# Altium PCB AphelionFlightController.PcbDoc
Units mm, origin at the board's own origin, x right, y up, seen from the top; angles counter-clockwise.
Board outline 100 x 100 mm, 2 copper layers (Top Layer, Bottom Layer); 68 components, 49 nets, 276 pads, 64 vias.
Unrouted connection lines stored in the file: 1.
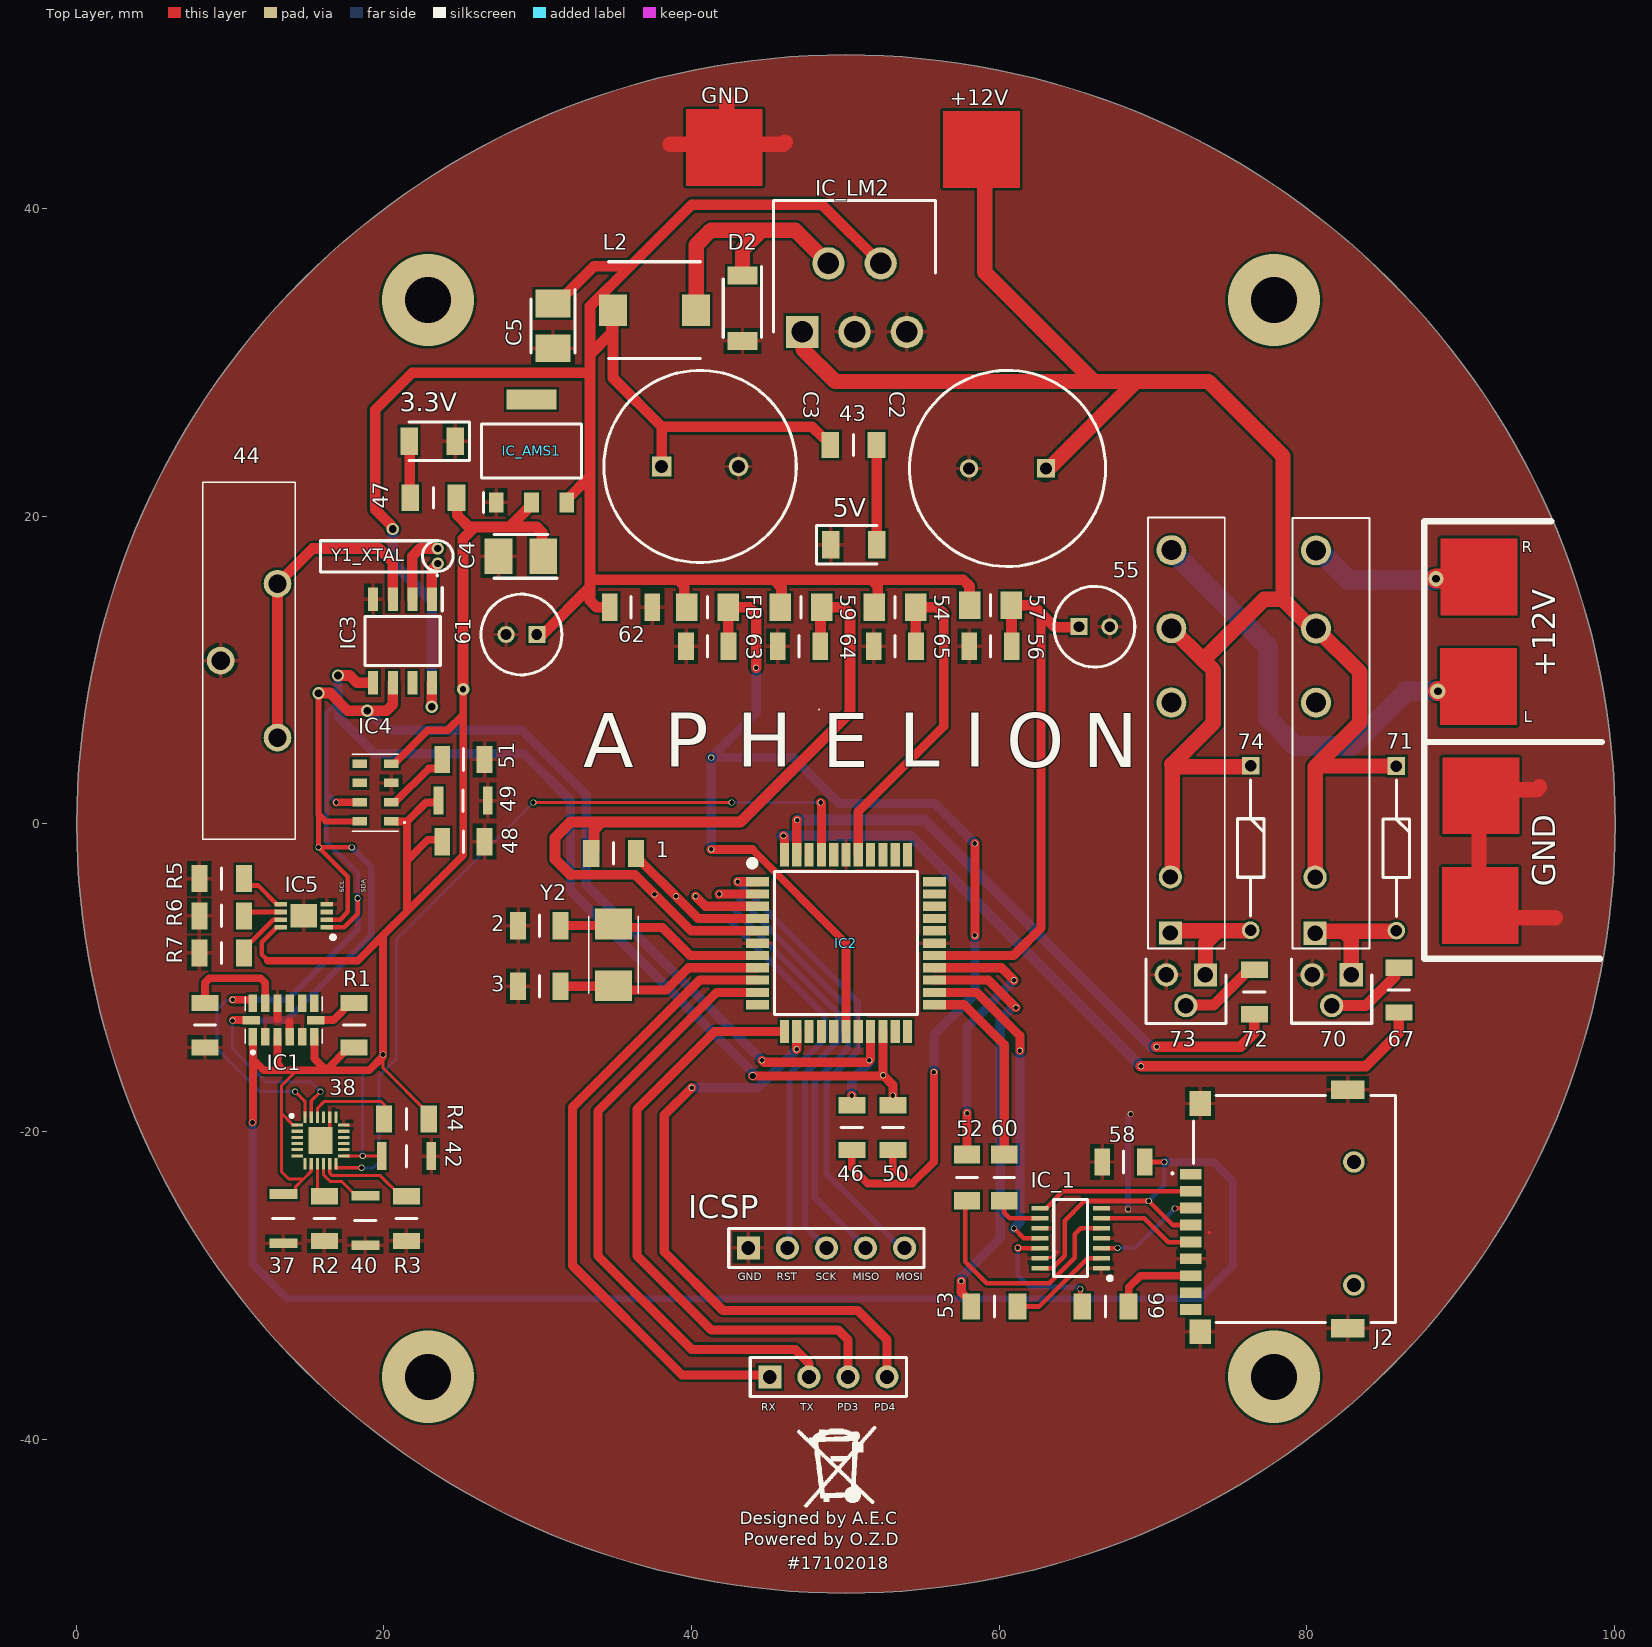
[diagram p0: Top Layer view]
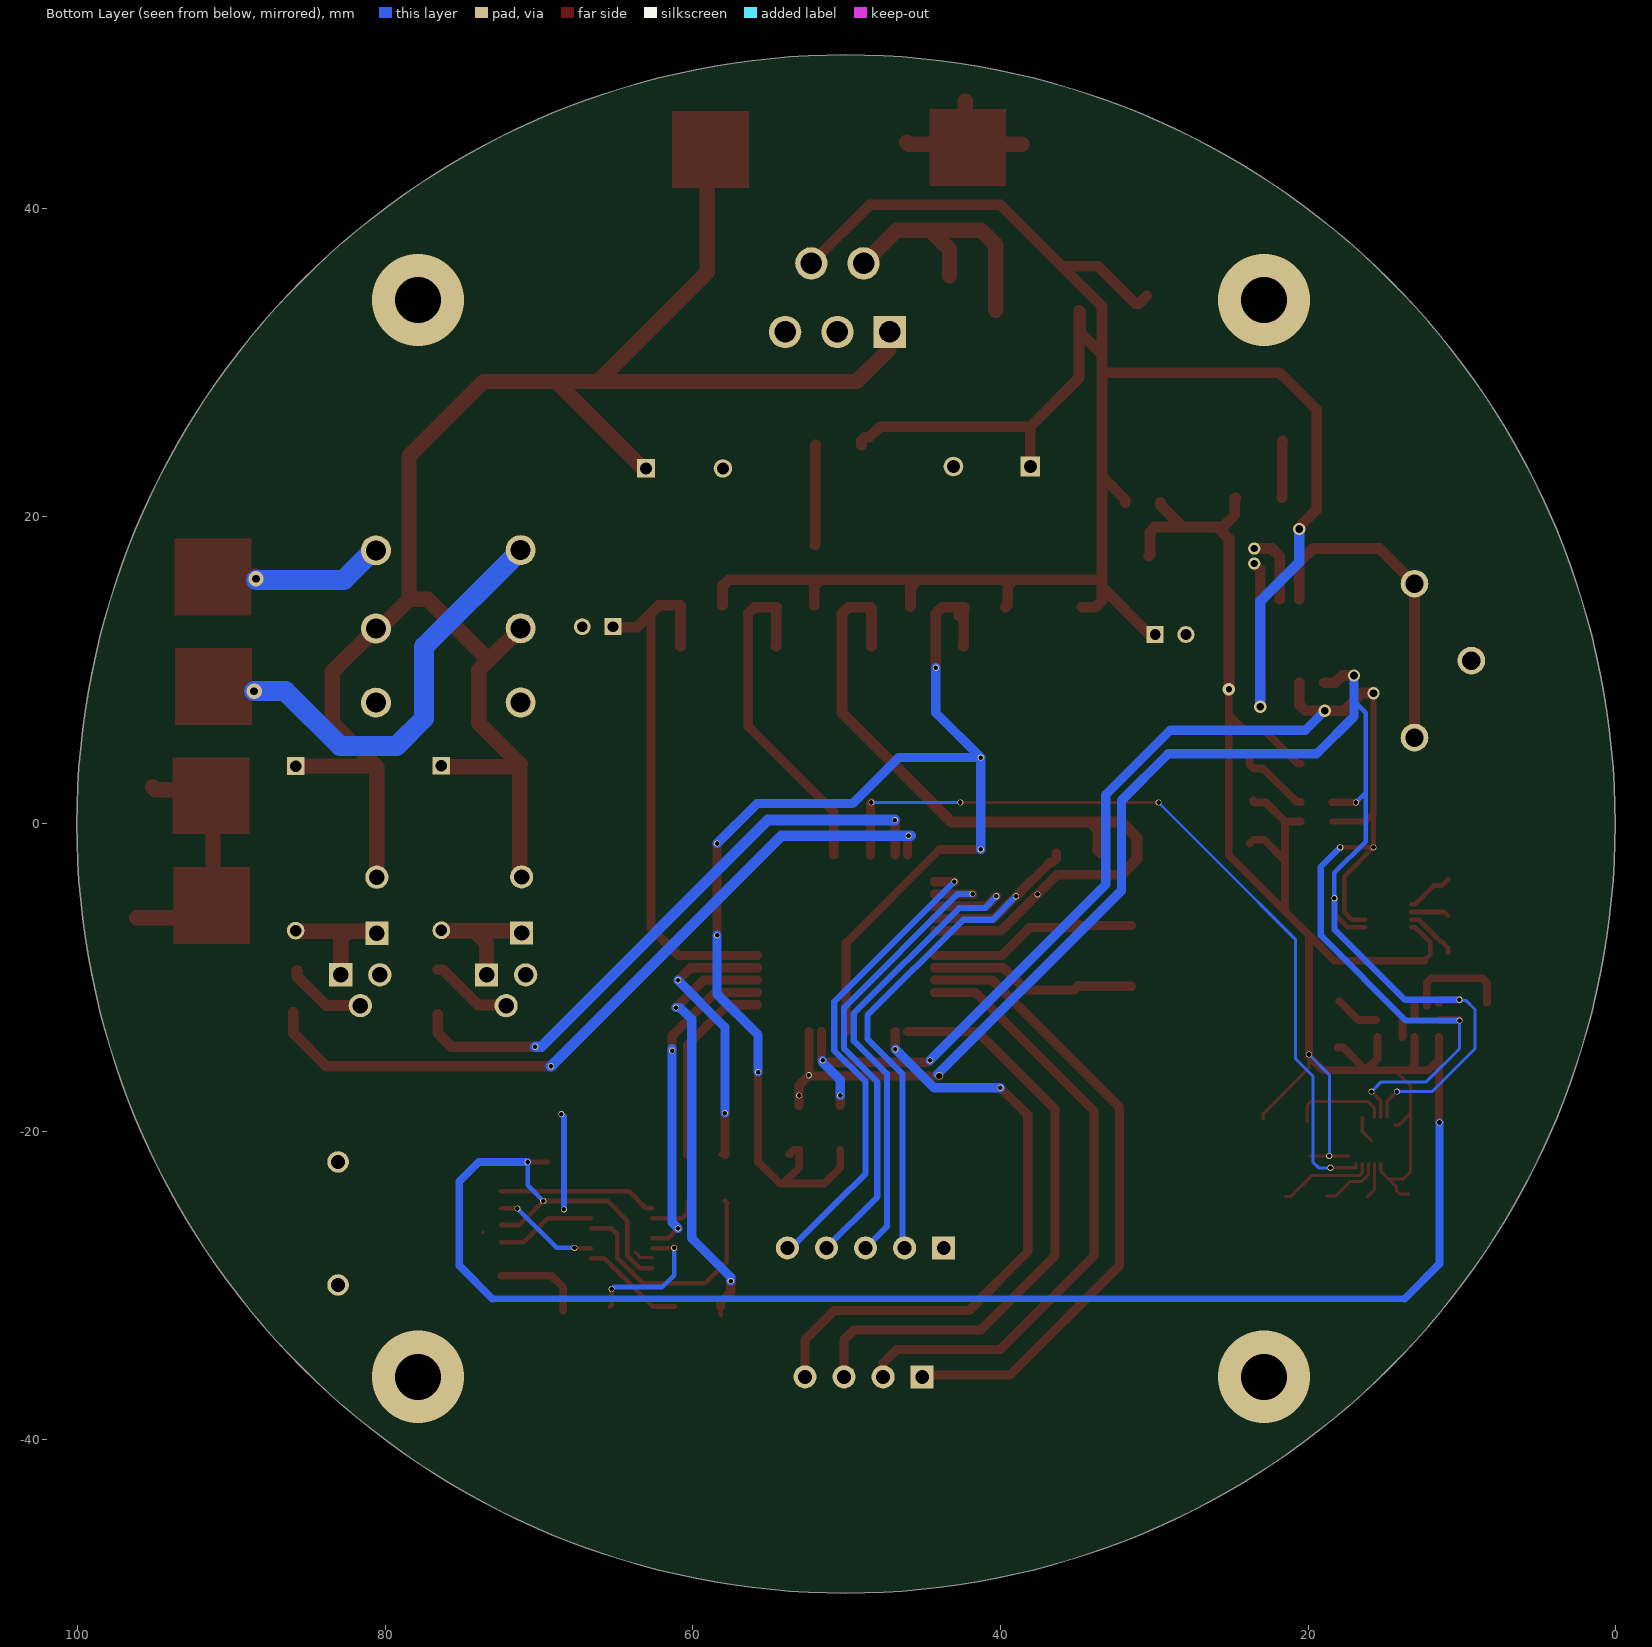
[diagram p1: Bottom Layer view, seen from below]
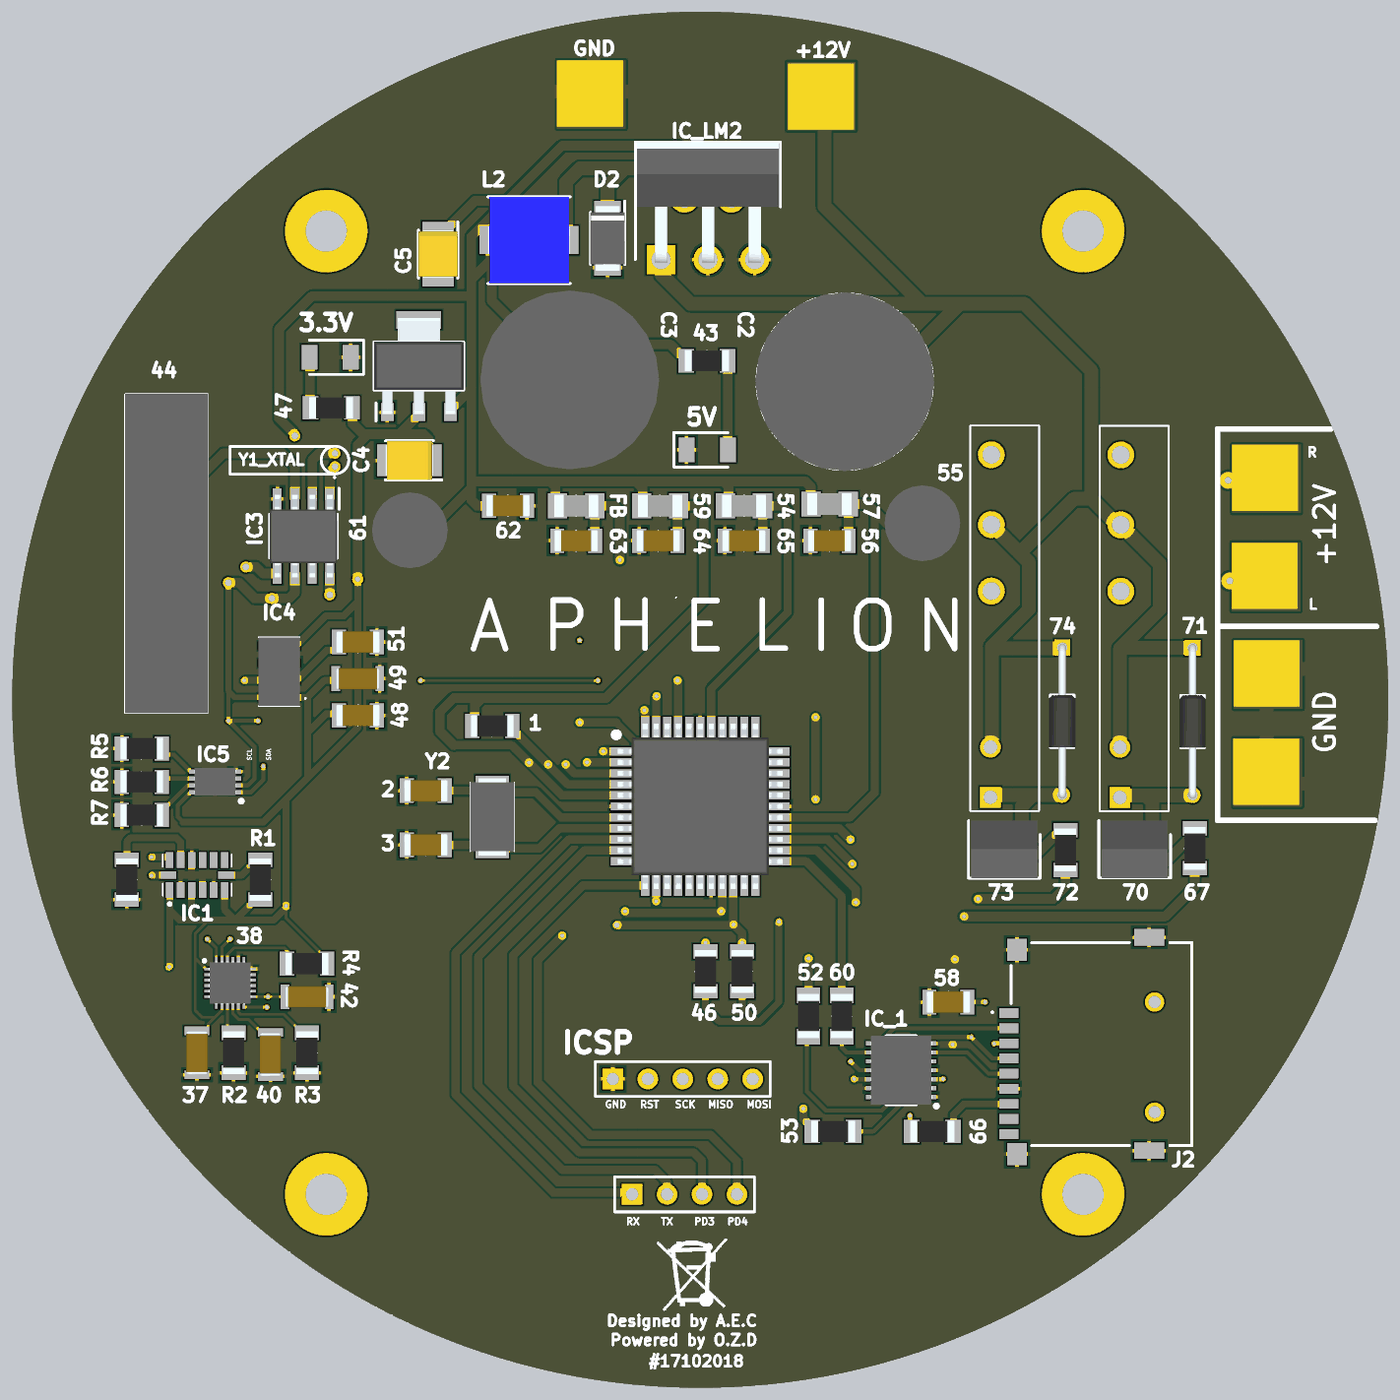
[diagram p2: 3D render of the assembled board from above, using the file's embedded part models]

## Layer stack, top to bottom
Top Solder: solder mask 0.0102, Solder Resist, Dk 3.5
Top Layer: signal copper 0.0356
Dielectric 1: dielectric 0.32, FR-4, Dk 4.8
Bottom Layer: signal copper 0.0356
Bottom Solder: solder mask 0.0102, Solder Resist, Dk 3.5

## Board outline
0.038,0 ccw(c50.038,0) 50.038,-50 ccw(c50.038,0) 100.038,0 ccw(c50.038,0) 50.038,50 ccw(c50.038,0)

## Design rules (kind name [scope] priority, off if disabled: settings)
Clearance [All] p1: gap=0.15 ignorepadtopadclearanceinfootprint=FALSE
Height [All] p1: minheight=0 maxheight=255.4 prefheight=12.7
PolygonConnect [All] p1: connectstyle=Relief reliefconductorwidth=0.254 reliefentries=4 polygonreliefangle="90 Angle" airgapwidth=0.254
RoutingVias [All] p1: holewidth=0.711 width=1.27 viastyle="Through Hole" minholewidth=0.711 minwidth=1.27 maxholewidth=0.711 maxwidth=1.27
SolderMaskExpansion [All] p1: expansion=0.102 istentingtop=FALSE
Width [All] p1: maxlimit=55 minlimit=0.1 preferedwidth=0.254 minimp=50.000000 maximp=50.000000 favimp=50.000000
29 further rules are at their usual default settings.

## Components (designator, comment, footprint, x,y, rotation, side; value= is the part's Value field where it differs from the comment)
1 "" RESC3116X65N 34.925,-1.905 r0 top
2 "C17_22pF" CAPC3216X100N 30.099,-6.604 r180 top
3 "C18_22pF" CAPC3216X100N 30.099,-10.541 r180 top
3.3V "LED1_1206" LEDC3216X130N 23.138,24.892 r180 top (schematic designator 45)
5V "LED2_1206" LEDC3216X130N 50.546,18.161 r0 top (schematic designator 41)
37 "C4_10N" CAPC3216X180N 13.462,-25.654 r270 top
38 "IC2_MPU-9250" QFN40P300X300X105-25N-D 15.875,-20.574 r0 top
40 "C5_100N" CAPC3216X180N 18.796,-25.781 r270 top
42 "C6_100N" CAPC3216X180N 21.463,-21.59 r180 top
43 "220ohm" RESC3216X70N 50.522,24.638 r0 top
44 "U1_KLS5" KLS5CR203204 13.081,15.621 r270 top
46 "" RESC3116X65N 50.419,-19.738 r90 top
47 "120ohm" RESC3216X70N 23.217,21.209 r0 top
48 "C1_100N" CAPC3216X100N 25.163,-1.143 r180 top
49 "C2_10uF" CAPC3216X180N 25.146,1.524 r180 top
50 "" RESC3116X65N 53.086,-19.738 r90 top
51 "C3_100N" CAPC3216X100N 25.163,4.191 r0 top
52 "" RESC3216X70N 57.912,-22.987 r270 top
53 "" RESC3216X70N 59.69,-31.369 r0 top
54 "" BEADC3216X180N 53.213,14.097 r0 top
55 "10uF" CAPPRD200W50D525H1250 65.183,12.827 r0 top
56 "C16_100N" CAPC3216X100N 59.436,11.557 r180 top
57 "" BEADC3216X180N 59.436,14.224 r0 top
58 "C11_100N" CAPC3216X100N 68.072,-21.971 r180 top
59 "" BEADC3216X180N 47.117,14.097 r0 top
60 "" RESC3216X70N 60.325,-22.987 r270 top
61 "10uF" CAPPRD200W50D525H1250 29.94,12.319 r180 top
62 "C12_100N" CAPC3216X100N 36.068,14.097 r0 top
63 "C13_100N" CAPC3216X100N 41.021,11.557 r180 top
64 "C14_100N" CAPC3216X100N 46.99,11.557 r180 top
65 "C15_100N" CAPC3216X100N 53.213,11.557 r180 top
66 "" RESC3216X70N 66.905,-31.369 r180 top
67 "" RESC3116X65N 85.979,-10.795 r270 top
70 "BC547B" TO127P419X482X1041-3P 82.88,-9.806 r180 top
71 "1N4148" DIOAD1068W53L380D172 85.816,3.767 r270 top
72 "" RESC3116X65N 76.581,-10.922 r270 top
73 "BC547B" TO127P419X482X1041-3P 73.406,-9.811 r180 top
74 "1N4148" DIOAD1068W53L380D172 76.342,3.79 r270 top
C2 "" CAPPRD500W60D1275H2200 63.039,23.114 r180 top
C3 "" CAPPRD500W65D1250H2200 38.053,23.241 r0 top
C4 "C10_TANT10" CAPPM3528X210N 28.903,17.399 r180 top
C5 "C9_TANT10" CAPPM3528X210N 30.988,32.385 r270 top
D2 "" SODFL4725X110N 43.307,33.528 r270 top
FB "" BEADC3216X180N 41.021,14.097 r0 top (schematic designator F_BEAD1)
IC1 "" CC-14-1 13.481,-12.745 r90 top
IC2 "ATMEGA32-16AU" QFP80P1200X1200X120-44N 50.038,-7.747 r0 top
IC3 "" SOIC127P600X175-8N 21.209,11.893 r270 top (schematic designator "IC3 DS1307")
IC4 "" MPL3115A2R1 19.44,2.042 r180 top (schematic designator "IC4 MPL3115A2")
IC5 "" SON50P300X200X100-9N-D 14.785,-5.969 r180 top (schematic designator "IC5 MCP9808")
IC_1 "" SON65P440X500X110-14N 64.643,-26.924 r180 top
IC_AMS1 "" SOT229P700X180-4N 29.591,24.257 r90 top
IC_LM2 "" TO170P470X1028X2142-5P 47.195,31.989 r0 top
J2 "L-KLS1-TF-003-H1.85-R" L-KLS1-TF-003-H1.85-R 83.058,-25.019 r90 top
L2 "33uH" INDPM6063X300N 37.592,33.401 r0 top
R1 "" RESC3116X65N 18.065,-13.077 r270 top
R2 "" RESC3116X65N 16.129,-25.654 r90 top
R3 "" RESC3116X65N 21.463,-25.654 r90 top
R4 "" RESC3116X65N 21.463,-19.177 r180 top
R5 "" RESC3116X65N 9.451,-3.556 r0 top
R6 "" RESC3116X65N 9.451,-5.969 r0 top
R7 "" RESC3116X65N 9.451,-8.382 r0 top
Y1_XTAL "" NC26LF-327 23.495,17.422 r90 top (schematic designator Y1)
Y2 "16MHZ" NX5032GA16MHZSTDCSK4 34.925,-8.509 r90 top
? "Comment" HDR1X4 45.085,-35.941 r0 top
? "Comment" HDR1X5 43.688,-27.559 r0 top
? "Comment" TE_1393236-2 82.821,-3.414 r90 top
? "Comment" TE_1393236-2 73.411,-3.401 r90 top
? "" RESC3116X65N 8.367,-13.077 r270 top

## Footprints (in the part's own frame and the unit in brackets; to place one, negate y for a bottom-side part, rotate by r counter-clockwise, add the part's x,y. Pads: shape width x height; smd on the part's side, far side on the other; paste and mask are expansions set on the pad)
BEADC3216X180N [mm]
  rect 1.4x1.8 smd: 1(-1.35,0) 2(1.35,0)
  silkscreen extent 0,-0.7 0,0.7, body extent -1.6,-0.8 1.6,0.8, height 1.8
CAPC3216X100N [mm]
  rect 1.02x1.78 smd: 1(-1.38,0) 2(1.38,0)
  silkscreen extent 0,-0.7 0,0.7, body extent -1.6,-0.8 1.6,0.8, height 1
CAPC3216X180N [mm]
  rect 0.62x1.82 smd: 1(-1.6,0) 2(1.6,0)
  silkscreen extent 0,-0.7 0,0.7, body extent -1.6,-0.8 1.6,0.8, height 1.8
CAPPM3528X210N [mm]
  rect 1.8x2.3 smd: 1(-1.45,0) 2(1.45,0)
  silkscreen extent -2.35,-1.43 1.75,1.43, body extent -1.75,-1.43 1.75,1.43, height 2.1
CAPPRD200W50D525H1250 [mm]
  rect 1.1x1.1 hole 0.7: 1(0,0)
  round 1.1 hole 0.7: 2(2,0)
  silkscreen extent -1.62,-2.62 3.63,2.62, body extent -1.75,-2.75 3.75,2.75, height 12.5
CAPPRD500W60D1275H2200 [mm]
  rect 1.2x1.2 hole 0.8: 1(0,0)
  round 1.2 hole 0.8: 2(5,0)
  silkscreen extent -3.88,-6.37 8.87,6.37, body extent -4,-6.5 9,6.5, height 22
CAPPRD500W65D1250H2200 [mm]
  rect 1.275x1.275 hole 0.85: 1(0,0)
  round 1.275 hole 0.85: 2(5,0)
  silkscreen extent -3.75,-6.25 8.75,6.25, body extent -4,-6.5 9,6.5, height 22
CC-14-1 [mm]
  rect 1.145x0.55 smd: 1(-1.098,2) 2(-1.098,1.2) 3(-1.098,0.4) 4(-1.098,-0.4) 5(-1.098,-1.2) 6(-1.098,-2) 8(1.098,-2) 9(1.098,-1.2) 10(1.098,-0.4) 11(1.098,0.4) 12(1.098,1.2) 13(1.098,2)
  rect 0.55x1.145 smd: 7(0,-2.097) 14(0,2.097)
  silkscreen extent -2.2,-2.5 1.5,2.5
DIOAD1068W53L380D172 [mm]
  rect 1.15x1.15 hole 0.75: 1(0,0)
  round 1.15 hole 0.75: 2(10.7,0)
  silkscreen extent 0.92,-0.86 9.77,0.86, body extent -0.26,-0.95 10.95,0.95, height 1.9
HDR1X4 [mm] "Connector; Header; 4 Position"
  rect 1.5x1.5 hole 0.9: 1(0,0)
  round 1.5 hole 0.9: 2(2.54,0) 3(5.08,0) 4(7.62,0)
  silkscreen extent -1.27,-1.27 8.89,1.27
HDR1X5 [mm] "Connector; Header; 5 Position"
  rect 1.5x1.5 hole 0.9: 1(0,0)
  round 1.5 hole 0.9: 2(2.54,0) 3(5.08,0) 4(7.62,0) 5(10.16,0)
  silkscreen extent -1.27,-1.27 11.43,1.27
INDPM6063X300N [mm]
  rect 1.8x2.05 smd: 1(-2.7,0) 2(2.7,0)
  silkscreen extent -3,-3.15 3,3.15, body extent -3,-3.15 3,3.15, height 3
KLS5CR203204 [mm]
  round 1.8 hole 1.2: 1(0,0) 2(10,0) 3(5,-3.7)
  silkscreen extent -6.6,-4.85 16.6,1.15, body extent -6.6,-4.85 16.6,1.15, height 18.13
L-KLS1-TF-003-H1.85-R [mm]
  rect 0.7x1.4 smd: 1(2.25,10.6) 2(1.15,10.6) 3(0.05,10.6) 4(-1.05,10.6) 5(-2.15,10.6) 6(-3.25,10.6) 7(-4.35,10.6) 8(-5.45,10.6) 9(-6.55,10.6)
  rect 1.6x1.4 smd: 10(-8,10) 13(6.85,10)
  rect 1.2x2.2 smd: 11(-7.75,0.4) 12(7.75,0.4)
  round 1.4 hole 0.9: 14(3.05,0) 15(-4.95,0)
  silkscreen extent -7.37,-2.71 7.37,11.84
LEDC3216X130N [mm]
  rect 1.15x1.8 smd: 1(-1.5,0) 2(1.5,0)
  silkscreen extent -2.42,-1.25 1.5,1.25
MPL3115A2R1 [mm]
  rect 0.95x0.55 smd: 1(-1.025,1.875) 2(-1.025,0.625) 3(-1.025,-0.625) 4(-1.025,-1.875) 5(1.025,-1.875) 6(1.025,-0.625) 7(1.025,0.625) 8(1.025,1.875)
  silkscreen extent -1.95,-2.5 1.5,2.5, body extent -1.5,-2.5 1.5,2.5, height 1.3
NC26LF-327 [mm]
  round 0.8 hole 0.47: 1(-0.485,0) 2(0.485,0)
  silkscreen extent -1.29,-1 1,1
NX5032GA16MHZSTDCSK4 [mm]
  rect 2x2.4 smd: 1(-2,0) 2(2,0)
  silkscreen extent -2.5,-1.6 2.5,1.6, body extent -2.8,-1.6 2.8,1.6, height 1.6
QFN40P300X300X105-25N-D [mm]
  rect 0.75x0.2 smd: 1(-1.5,1) 2(-1.5,0.6) 3(-1.5,0.2) 4(-1.5,-0.2) 5(-1.5,-0.6) 6(-1.5,-1) 13(1.5,-1) 14(1.5,-0.6) 15(1.5,-0.2) 16(1.5,0.2) 17(1.5,0.6) 18(1.5,1)
  rect 0.2x0.75 smd: 7(-1,-1.5) 8(-0.6,-1.5) 9(-0.2,-1.5) 10(0.2,-1.5) 11(0.6,-1.5) 12(1,-1.5) 19(1,1.5) 20(0.6,1.5) 21(0.2,1.5) 22(-0.2,1.5) 23(-0.6,1.5) 24(-1,1.5)
  rect 1.59x1.75 smd: 25(0,0)
  silkscreen extent -1.97,1.5 -1.78,1.7, body extent -1.55,-1.55 1.55,1.55, height 1.05
QFP80P1200X1200X120-44N [mm]
  rect 1.5x0.6 smd: 1(-5.75,4) 2(-5.75,3.2) 3(-5.75,2.4) 4(-5.75,1.6) 5(-5.75,0.8) 6(-5.75,0) 7(-5.75,-0.8) 8(-5.75,-1.6) 9(-5.75,-2.4) 10(-5.75,-3.2) 11(-5.75,-4) 23(5.75,-4) 24(5.75,-3.2) 25(5.75,-2.4) 26(5.75,-1.6) 27(5.75,-0.8) 28(5.75,0) 29(5.75,0.8) 30(5.75,1.6) 31(5.75,2.4) 32(5.75,3.2) 33(5.75,4)
  rect 0.6x1.5 smd: 12(-4,-5.75) 13(-3.2,-5.75) 14(-2.4,-5.75) 15(-1.6,-5.75) 16(-0.8,-5.75) 17(0,-5.75) 18(0.8,-5.75) 19(1.6,-5.75) 20(2.4,-5.75) 21(3.2,-5.75) 22(4,-5.75) 34(4,5.75) 35(3.2,5.75) 36(2.4,5.75) 37(1.6,5.75) 38(0.8,5.75) 39(0,5.75) 40(-0.8,5.75) 41(-1.6,5.75) 42(-2.4,5.75) 43(-3.2,5.75) 44(-4,5.75)
  silkscreen extent -6.3,-4.65 4.65,5.4, body extent -6,-6 6,6, height 1.2
RESC3116X65N [mm]
  rect 1.05x1.75 smd: 1(-1.45,0) 2(1.45,0)
  silkscreen extent 0,-0.69 0,0.69, body extent -1.55,-0.79 1.55,0.79, height 0.65
RESC3216X70N [mm]
  rect 1.15x1.7 smd: 1(-1.5,0) 2(1.5,0)
  silkscreen extent 0,-0.67 0,0.67, body extent -1.6,-0.77 1.6,0.77, height 0.7
SODFL4725X110N [mm]
  rect 1.17x1.93 smd: 1(-2.125,0) 2(2.125,0)
  silkscreen extent -2.71,-1.25 1.9,1.25, body extent -2.35,-1.25 2.35,1.25, height 1.1
SOIC127P600X175-8N [mm]
  rect 1.525x0.65 smd: 1(-2.712,1.905) 2(-2.712,0.635) 3(-2.712,-0.635) 4(-2.712,-1.905) 5(2.712,-1.905) 6(2.712,-0.635) 7(2.712,0.635) 8(2.712,1.905)
  silkscreen extent -3.47,-2.45 1.6,2.58, body extent -3,-2.45 3,2.45, height 1.75
SON50P300X200X100-9N-D [mm]
  rect 0.8x0.3 smd: 1(-1.5,0.75) 2(-1.5,0.25) 3(-1.5,-0.25) 4(-1.5,-0.75) 5(1.5,-0.75) 6(1.5,-0.25) 7(1.5,0.25) 8(1.5,0.75)
  rect 1.75x1.55 smd: 9(0,0)
  silkscreen extent -2.02,1.28 -1.78,1.52, body extent -1.55,-1 1.55,1, height 1
SON65P440X500X110-14N [mm]
  rect 1.1x0.3 smd: 1(-2,1.95) 2(-2,1.3) 3(-2,0.65) 4(-2,0) 5(-2,-0.65) 6(-2,-1.3) 7(-2,-1.95) 8(2,-1.95) 9(2,-1.3) 10(2,-0.65) 11(2,0) 12(2,0.65) 13(2,1.3) 14(2,1.95)
  silkscreen extent -2.68,-2.5 1.1,2.72, body extent -2.25,-2.5 2.25,2.5, height 1.1
SOT229P700X180-4N [mm]
  rect 1.3x0.95 smd: 1(-3.35,2.29) 2(-3.35,0) 3(-3.35,-2.29)
  rect 1.3x3.25 smd: 4(3.35,0)
  silkscreen extent -4,-3.25 1.75,3.25, body extent -3.5,-3.25 3.5,3.25, height 1.8
TE_1393236-2 [mm]
  round 1.95 hole 1.3: 11(16.126,2.222) 12(11.3,2.222) 14(21.206,2.222)
  rect 1.508x1.508 hole 1: A1(-3.686,2.286)
  round 1.508 hole 1: A2(-0.043,2.286)
  silkscreen extent -4.68,-1.25 23.32,3.75
TO127P419X482X1041-3P [mm]
  rect 1.515x1.515 hole 1.01: 1(0,0)
  round 1.515 hole 1.01: 2(1.27,2) 3(2.54,0)
  silkscreen extent -1.34,-1.04 3.88,3.15, body extent -1.14,-1.04 3.68,3.15, height 10.16
TO170P470X1028X2142-5P [mm]
  rect 2.1x2.1 hole 1.4: 1(0,0)
  round 2.1 hole 1.4: 2(1.7,4.46) 3(3.4,0) 4(5.1,4.46) 5(6.8,0)
  silkscreen extent -1.87,0 8.67,8.53, body extent -1.74,-0.24 8.54,8.53, height 20.67

## Part data
1 46 50 67 72 R1 R2 R3 R4 R5 R6 R7 ?: library part MC1206S4F5600T5E, "Resistor", Manufacturer_Name=MULTICOMP, Datasheet Link=http://www.newark.com/pdfs/datasheets/spc/TA-677.pdf?_ga=1.248182791.1411154270.1472651675, Height=0.65mm, Manufacturer_Part_Number=MC1206S4F5600T5E
2 3 48 51 56 58 62 63 64 65: library part CL31B104KBCNNNC, "Capacitor", Manufacturer_Name="Samsung Electro-Mechanics", RS Part Number=7666947, Datasheet Link=http://www.samsungsem.com/kr/support/product-search/mlcc/CL31B104KBCNNNC.jsp, Height=1mm, Manufacturer_Part_Number=CL31B104KBCNNNC, RS Price/Stock=http://uk.rs-online.com/web/p/products/7666947
3.3V 5V: library part QTLP650C2TR, "LED", Manufacturer_Name=Everlight, Mouser Part Number=638-QTLP650C2, Datasheet Link=https://media.digikey.com/pdf/Data%20Sheets/Everlight%20PDFs/QTLP650(C,D)-2,3,4,7,B.pdf, Height=1.3mm, Manufacturer_Part_Number=QTLP650C2TR, Mouser Price/Stock=https://www.mouser.com/Search/Refine.aspx?Keyword=638-QTLP650C2
37 40 42 49: library part CL31A106KBHNNNE, "Capacitor", Manufacturer_Name="Samsung Electro-Mechanics", Mouser Part Number=N/A, Datasheet Link=http://www.samsungsem.com/kr/support/product-search/mlcc/__icsFiles/afieldfile/2016/08/18/S_CL31A106KBHNNNE.pdf, Height=1.8mm, Manufacturer_Part_Number=CL31A106KBHNNNE, Mouser Price/Stock=https://www.mouser.com/Search/Refine.aspx?Keyword=N%2FA
38: library part MPU-9250, "Integrated Circuit", Manufacturer_Name="InvenSense Inc.", Mouser Part Number=410-MPU-9250, RS Part Number=8837942P, Datasheet Link=https://store.invensense.com/datasheets/invensense/MPU9250REV1.0.pdf, Height=1.05mm, Manufacturer_Part_Number=MPU-9250, Mouser Price/Stock=https://www.mouser.com/Search/Refine.aspx?Keyword=410-MPU-9250, RS Price/Stock=http://uk.rs-online.com/web/p/products/8837942P
43 47 52 53 60 66: library part ERJ-U08F2200V, "Resistor", Manufacturer_Name=Panasonic, Mouser Part Number=667-ERJ-U08F2200V, Datasheet Link=http://uk.rs-online.com/web/p/products/1724351, Height=0.7mm, Manufacturer_Part_Number=ERJ-U08F2200V, Mouser Price/Stock=https://www.mouser.com/Search/Refine.aspx?Keyword=667-ERJ-U08F2200V
44: library part KLS5-CR2032-04, "Undefined or Miscellaneous", Manufacturer_Name="KLS Electronic", Datasheet Link=http://www.klsele.com/admin/product_upload/20151124101114KLS5-CR2032-04.pdf, Height=18.13mm, Manufacturer_Part_Number=KLS5-CR2032-04
54 57 59 FB: library part BLM31KN601BH1L, "Filter", Manufacturer_Name="Murata Electronics", Mouser Part Number=81-BLM31KN601BH1L, Datasheet Link=https://www.murata.com/en-us/products/productdetail?partno=BLM31KN601BH1%23, Height=1.8mm, Manufacturer_Part_Number=BLM31KN601BH1L, Mouser Price/Stock=https://www.mouser.com/Search/Refine.aspx?Keyword=81-BLM31KN601BH1L
55 61: library part UHE1H100MDD1TD, "Capacitor Polarised", Manufacturer_Name=Nichicon, Mouser Part Number=647-UHE1H100MDD1TD, Datasheet Link=http://nichicon-us.com/english/products/pdfs/e-uhe.pdf, Height=12.5mm, Manufacturer_Part_Number=UHE1H100MDD1TD, Mouser Price/Stock=https://www.mouser.com/Search/Refine.aspx?Keyword=647-UHE1H100MDD1TD
70 73: "Transistor BJT NPN", Manufacturer_Name="ON Semiconductor", Mouser Part Number=512-BC547B, RS Part Number=7619828P, Datasheet Link=http://www.onsemi.com/pub/Collateral/BC546-D.PDF, Height=4.19mm, Manufacturer_Part_Number=BC547B, Mouser Price/Stock=https://www.mouser.com/Search/Refine.aspx?Keyword=512-BC547B, RS Price/Stock=http://uk.rs-online.com/web/p/products/7619828P
71 74: "Diode", Manufacturer_Name="Micro Commercial Components (MCC)", Mouser Part Number=833-1N4148, Datasheet Link=https://componentsearchengine.com/Datasheets/1/1N4148.pdf, Manufacturer_Part_Number=1N4148, Mouser Price/Stock=https://www.mouser.com/Search/Refine.aspx?Keyword=833-1N4148
C2: library part UPW1V681MHD, "Capacitor Polarised", Manufacturer_Name=Nichicon, Mouser Part Number=647-UPW1V681MHD, RS Part Number=7152776P, Allied Price/Stock=https://www.alliedelec.com/nichicon-upw1v681mhd/70187400/, Allied_Number=70187400, Datasheet Link=http://nichicon-us.com/english/products/pdfs/e-upw.pdf, Height=22mm, Manufacturer_Part_Number=UPW1V681MHD, Mouser Price/Stock=https://www.mouser.com/Search/Refine.aspx?Keyword=647-UPW1V681MHD, RS Price/Stock=http://uk.rs-online.com/web/p/products/7152776P
C3: library part EEU-FC1J221S, "Capacitor Polarised", Manufacturer_Name=Panasonic, Mouser Part Number=667-EEU-FC1J221S, Datasheet Link=http://uk.rs-online.com/web/p/products/6283835, Height=22mm, Manufacturer_Part_Number=EEU-FC1J221S, Mouser Price/Stock=https://www.mouser.com/Search/Refine.aspx?Keyword=667-EEU-FC1J221S
C4 C5: library part TAJB106M025RNJ, "Capacitor Polarised", Manufacturer_Name=AVX, Mouser Part Number=581-TAJB106M025RNJ, Datasheet Link=http://datasheets.avx.com/TAJ.pdf, Height=2.1mm, Manufacturer_Part_Number=TAJB106M025RNJ, Mouser Price/Stock=https://www.mouser.com/Search/Refine.aspx?Keyword=581-TAJB106M025RNJ
D2: library part VSS8D5M10-M3_H, "Schottky Diode", Manufacturer_Name=Vishay, Manufacturer_Part_Number=VSS8D5M10-M3/H, Mouser Part Number=78-VSS8D5M10-M3/H, Datasheet Link=https://componentsearchengine.com/Datasheets/1/VSS8D5M10-M3_H.pdf, Height=1.1mm, Mouser Price/Stock=https://www.mouser.com/Search/Refine.aspx?Keyword=78-VSS8D5M10-M3%2FH
IC1: library part ADXL345BCCZ-RL7, "Accelerometer", Manufacturer_Name="Analog Devices", Mouser Part Number=584-ADXL345BCCZ-R7, RS Part Number=9140413, Datasheet Link=https://www.analog.com/media/en/technical-documentation/data-sheets/ADXL345.pdf, Manufacturer_Part_Number=ADXL345BCCZ-RL7, Mouser Price/Stock=https://www.mouser.com/Search/Refine.aspx?Keyword=584-ADXL345BCCZ-R7, RS Price/Stock=http://uk.rs-online.com/web/p/products/9140413
IC2: "Integrated Circuit", Manufacturer_Name=Microchip, Mouser Part Number=556-ATMEGA32-16AU, RS Part Number=6281485P, Datasheet Link=http://docs-emea.rs-online.com/webdocs/091f/0900766b8091f466.pdf, Height=1.2mm, Manufacturer_Part_Number=ATMEGA32-16AU, Mouser Price/Stock=https://www.mouser.com/Search/Refine.aspx?Keyword=556-ATMEGA32-16AU, RS Price/Stock=http://uk.rs-online.com/web/p/products/6281485P
IC3: library part DS1307ZN+, "Integrated Circuit", Manufacturer_Name="Maxim Integrated", Mouser Part Number=700-DS1307ZN, RS Part Number=1898602P, Datasheet Link=https://datasheets.maximintegrated.com/en/ds/DS1307.pdf, Height=1.75mm, Manufacturer_Part_Number=DS1307ZN+, Mouser Price/Stock=https://www.mouser.com/Search/Refine.aspx?Keyword=700-DS1307ZN, RS Price/Stock=http://uk.rs-online.com/web/p/products/1898602P
IC4: library part MPL3115A2R1, "Integrated Circuit", Manufacturer_Name=NXP, Mouser Part Number=841-MPL3115A2R1, Datasheet Link=http://www.nxp.com/docs/en/data-sheet/MPL3115A2.pdf, Height=1.2mm, Manufacturer_Part_Number=MPL3115A2R1, Mouser Price/Stock=https://www.mouser.com/Search/Refine.aspx?Keyword=841-MPL3115A2R1
IC5: library part MCP9808T-E_MC, "Integrated Circuit", Manufacturer_Name=Microchip, Manufacturer_Part_Number=MCP9808T-E/MC, Mouser Part Number=579-MCP9808T-E/MC, RS Part Number=1371041P, Allied Price/Stock=https://www.alliedelec.com/microchip-technology-inc-mcp9808t-e-mc/70451339/, Allied_Number=70451339, Datasheet Link=http://www.mouser.com/ds/2/268/25095A-15487.pdf, Height=1mm, Mouser Price/Stock=https://www.mouser.com/Search/Refine.aspx?Keyword=579-MCP9808T-E%2FMC, RS Price/Stock=http://uk.rs-online.com/web/p/products/1371041P
IC_1: library part 74LVC125APW,112, "Integrated Circuit", Manufacturer_Name=Nexperia, Mouser Part Number=771-LVC125APW112, RS Part Number=3559993P, Datasheet Link=https://assets.nexperia.com/documents/data-sheet/74LVC125A.pdf, Height=1.1mm, Manufacturer_Part_Number=74LVC125APW,112, Mouser Price/Stock=https://www.mouser.com/Search/Refine.aspx?Keyword=771-LVC125APW112, RS Price/Stock=http://uk.rs-online.com/web/p/products/3559993P
IC_AMS1: library part ams1117-3.3v, "Integrated Circuit", Manufacturer_Name="Advanced Monolithic Systems", Datasheet Link=http://www.advanced-monolithic.com/pdf/ds1117.pdf, Height=1.8mm, Manufacturer_Part_Number=ams1117-3.3v
IC_LM2: library part LM2596T-5.0, "Integrated Circuit", Manufacturer_Name="Texas Instruments", Mouser Part Number=926-LM2596T-50, RS Part Number=3313242, Datasheet Link=http://www.ti.com/general/docs/lit/getliterature.tsp?genericPartNumber=lm2596&fileType=pdf, Height=4.7mm, Manufacturer_Part_Number=LM2596T-5.0, Mouser Price/Stock=https://www.mouser.com/Search/Refine.aspx?Keyword=926-LM2596T-50, RS Price/Stock=http://uk.rs-online.com/web/p/products/3313242
J2: "Connector", Manufacturer_Name="KLS Electronic", Datasheet Link=https://img.ozdisan.com/ETicaret_Dosya/476392_7149645.pdf, Manufacturer_Part_Number=L-KLS1-TF-003-H1.85-R
L2: library part B82462G4333M000, "Inductor", Manufacturer_Name=EPCOS, Mouser Part Number=871-B82462G4333M, RS Part Number=4958161P, Datasheet Link=https://en.tdk.eu/inf/30/db/ind_2008/b82462g4.pdf, Height=3mm, Manufacturer_Part_Number=B82462G4333M000, Mouser Price/Stock=https://www.mouser.com/Search/Refine.aspx?Keyword=871-B82462G4333M, RS Price/Stock=http://uk.rs-online.com/web/p/products/4958161P
Y1_XTAL: library part NC26LF-327, "Crystal or Oscillator", Manufacturer_Name=Fox, Mouser Part Number=559-NC26-LF, RS Part Number=5476979P, Datasheet Link=https://componentsearchengine.com/Datasheets/2/NC26LF-327.pdf, Manufacturer_Part_Number=NC26LF-327, Mouser Price/Stock=https://www.mouser.com/Search/Refine.aspx?Keyword=559-NC26-LF, RS Price/Stock=http://uk.rs-online.com/web/p/products/5476979P
Y2: library part NX5032GA-16MHZ-STD-CSK-4, "Crystal or Oscillator", Manufacturer_Name=NDK, Datasheet Link=http://www.ndk.com/images/products/catalog/c_NX5032GA_e.pdf, Height=1.5mm, Manufacturer_Part_Number=NX5032GA-16MHZ-STD-CSK-4

## Via types
v1: diameter 0.4, hole 0.3, Top Layer to Bottom Layer, 51 vias
v2: diameter 0.8, hole 0.5, Top Layer to Bottom Layer, 5 vias
v3: diameter 6, hole 3, Top Layer to Bottom Layer, 4 vias
v4: diameter 1, hole 0.5, Top Layer to Bottom Layer, 2 vias
v5: diameter 0.5, hole 0.4, Top Layer to Bottom Layer, 1 vias
v6: diameter 0.8, hole 0.4, Top Layer to Bottom Layer, 1 vias

## Nets (pads, with @x,y where several pads share a name; then routed paths per layer and width w, separated by ;. In a path a pad name is that pad's centre, name@x,y a point inside that pad or via, vN(x,y) a via of type N, cw(c..) or ccw(c..) an arc to the next point about the centre after c; other vN are vias at no path point)
5V: 43.1 54.1 57.1 59.1 61.1 62.1 C3.1 C5.1 FB.1 IC3.8 IC_AMS1.3 IC_LM2.4 L2.1 | length 153.1
  Top Layer w0.7: v2@20.447,19.431 19.431,20.447 19.431,26.924 21.844,29.337 33.401,29.337 ; v2(23.114,7.62) IC3.8 ; 61.1 30.321,12.319 33.401,15.399 ; C5.1@30.48,34.343 C5.1 31.238,33.835 33.661,36.258 36.005,36.258 ; IC_AMS1.3 31.881,21.082 33.401,22.602 ; 62.1 33.811,14.097 33.401,14.507 33.401,15.399 ; C3.1 38.053,25.828 ; FB.1 39.526,14.242 39.526,15.465 39.116,15.875 ; 59.1@45.847,14.144 45.847,15.367 45.339,15.875 ; 43.1 49.022,24.913 48.797,25.138 48.522,25.138 47.832,25.828 38.053,25.828 ; 54.1@52.099,14.242 52.099,15.465 51.689,15.875 ; IC_LM2.4 48.485,40.259 40.005,40.259 36.005,36.258 ; 57.1 58.068,14.242 58.068,15.465 57.658,15.875 51.689,15.875 ; 33.401,15.399 33.401,15.875 ; 33.401,15.875 39.116,15.875 ; 33.401,15.875 33.401,22.602 ; 33.401,22.602 33.401,29.337 ; 33.401,29.337 33.401,30.529 ; 33.401,30.529 34.801,31.929 34.801,33.31 L2.1 34.892,28.989 38.053,25.828 ; 33.401,30.529 33.401,33.655 36.005,36.258 ; 39.116,15.875 45.339,15.875 ; 45.339,15.875 51.689,15.875
  Bottom Layer w0.7: v2(20.574,19.177) 20.574,17.018 23.114,14.478 v2(23.114,7.62)
12V: 71.1 74.1 ?.11 ?.A2 C2.1 IC_LM2.1 | length 127.6
  Top Layer w1: IC_LM2.1 47.244,31.94 47.244,30.861 49.34,28.765 66.167,28.765 ; 59.389,43.307 59.055,43.307 59.055,35.877 66.167,28.765 ; C2.1@63.143,23.011 68.897,28.765 ; ?.A2@71.125,-3.444 71.222,-3.347 71.222,-2.988 71.247,-2.963 71.247,3.87 71.492,3.725 76.276,3.725 74.1 ; ?.11@71.189,12.725 73.263,10.652 ; 71.223,3.876 73.914,6.567 73.914,10 73.263,10.652 ; ?.A2@80.535,-3.457 80.535,3.7 83.439,6.604 83.439,9.872 80.599,12.712 80.342,12.712 78.449,14.605 ; 80.645,3.767 71.1 ; 66.167,28.765 68.897,28.765 ; 68.897,28.765 73.596,28.765 78.449,23.913 78.449,14.605 ; 73.263,10.652 77.216,14.605 78.449,14.605
GND: 2.2 3.2 3.3V.1 5V.1 37.2 38.18 38.20 38.25 40.2 42.1 44.3 48.1 49.1 51.2 55.2 56.2 58.2 61.2 62.2 63.2 64.2 65.2 70.3 73.3 ?.1@43.688,-27.559 ?.2@8.367,-14.527 C2.2 C3.2 C4.2 C5.2 D2.2 IC1.2 IC1.4 IC1.5 IC1.11 IC2.6 IC2.18 IC2.28 IC2.39 IC3.4 IC4.3 IC5.4 IC5.9 IC_1.1 IC_1.4 IC_1.7 IC_1.10 IC_1.13 IC_AMS1.1 IC_LM2.3 IC_LM2.5 J2.6 J2.10 J2.11 J2.12 J2.13 R2.1 R3.1 R5.1 R6.1 R7.1 | length 32.3
  Top Layer w0.2: 38.25 16.475,-19.974 38.20 ; 46.101,44.323 46.228,44.196 ; IC_1.13 62.673,-28.194 63.373,-28.194 63.754,-27.813 ; 73.634,-26.569 73.66,-26.543
  Top Layer w0.5: 13.081,-12.7 IC1.11 ; 13.843,-12.827 13.856,-12.84 13.856,-13.818 IC1.4
  Top Layer w1: 38.608,44.196 45.974,44.196 46.101,44.323 ; 42.291,45.72 42.291,46.99 ; 91.059,1.524 91.186,1.397 91.186,-5.461 ; 93.188,2.223 94.933,2.223 95.123,2.413 ; 93.345,-6.096 96.139,-6.096
  Bottom Layer w0.4: v1(68.381,-25.057) 68.381,-19.026 v1(68.543,-18.864)
Net1_1: 1.1 59.2 64.1 IC2.5 | length 52.4
  Top Layer w0.6: 32.131,-3.302 36.322,-3.302 v1(37.592,-4.572) 39.967,-6.947 IC2.5
  Top Layer w0.7: 32.131,-3.302 31.115,-2.286 31.115,-0.889 32.131,0.127 34.163,0.127 ; 1.1 33.65,-1.73 33.65,-0.386 34.163,0.127 ; 64.1 48.387,11.574 48.387,14.017 59.2 49.882,14.097 50.292,13.687 50.292,7.239 43.18,0.127 34.163,0.127
Net1_2: 1.2 ?.2@46.228,-27.559 IC2.4 | length 38.8
  Top Layer w0.6: 1.2 36.375,-2.255 36.6,-2.48 36.77,-2.48 v1(38.989,-4.699) 40.437,-6.147 IC2.4
  Bottom Layer w0.4: v1(38.989,-4.699) 40.513,-6.223 42.418,-6.223 48.641,-12.446 48.641,-13.97 46.355,-16.256 46.355,-27.432 ?.2@46.228,-27.559
Net2_1: 2.1 IC2.7 Y2.2 | length 13.7
  Top Layer w0.6: 2.1 34.83,-6.604 Y2.2 35.147,-6.731 38.1,-6.731 39.916,-8.547 IC2.7
Net3_1: 3.1 IC2.8 Y2.1 | length 13.5
  Top Layer w0.6: 3.1 34.893,-10.541 Y2.1 35.211,-10.795 38.354,-10.795 39.802,-9.347 IC2.8
Net38_9: 38.9 R2.2 | length 2.3
  Top Layer w0.2: 38.9 15.675,-23.779 16.1,-24.204 R2.2
Net38_10: 38.10 40.1 | length 4
  Top Layer w0.2: 38.10 16.075,-22.806 16.51,-23.241 17.256,-23.241 18.196,-24.181 40.1
Net38_11: 38.11 R3.2 | length 6.2
  Top Layer w0.2: 38.11 16.475,-22.698 16.637,-22.86 19.769,-22.86 21.113,-24.204 R3.2
Net38_22: 38.22 R4.2 | length 6.3
  Top Layer w0.2: 38.22 15.675,-18.488 16.129,-18.034 19.812,-18.034 20.066,-18.288 R4.2@20.066,-19.333
Net38_23: 38.23 46.2 IC1.14 IC2.19 IC3.6 IC4.8 IC5.2 | length 108.8
  Top Layer w0.2: 38.23 15.275,-17.999 v1(15.875,-17.399)
  Top Layer w0.3: v1(10.152,-12.783) v1@10.189,-12.745 ; 15.748,0.635 v1(15.748,-1.524) ; IC5.2 17.149,-6.219 17.653,-5.715 17.653,-3.429 v1(15.748,-1.524) ; v1(17.907,-1.524) v1(15.748,-1.524)
  Top Layer w0.4: v2(15.748,8.509) 15.748,0.635 16.216,0.167 IC4.8
  Top Layer w0.5: v1@10.189,-12.745 IC1.14
  Top Layer w0.6: v1(44.577,-15.367) 44.704,-15.494 51.435,-15.494 51.638,-15.291 IC2.19 ; 46.2 v1(50.419,-17.653)
  Top Layer w0.7: v2(15.748,8.509) 16.51,8.509 17.653,7.366 v2(18.908,7.366) 20.164,7.366 20.574,7.776 IC3.6
  Bottom Layer w0.2: v1(10.152,-12.783) 10.16,-12.791 10.16,-14.605 12.319,-16.764 15.24,-16.764 v1(15.875,-17.399)
  Bottom Layer w0.4: v1(10.152,-12.783) 13.633,-12.783 19.177,-7.239 19.177,-2.794 v1(17.907,-1.524)
  Bottom Layer w0.6: v2(18.908,7.366) 20.178,6.096 28.956,6.096 33.147,1.905 33.147,-3.937 v1(44.577,-15.367) ; v1(50.419,-17.653) 50.419,-16.637 51.562,-15.494 v1(51.562,-15.367)
Net38_24: 38.24 50.2 IC1.13 IC2.20 IC3.5 IC4.7 IC5.1 | length 103.8
  Top Layer w0.2: v1(14.224,-17.399) 14.875,-18.05 38.24
  Top Layer w0.3: IC5.1 17.411,-6.719 18.288,-5.842 v1(18.288,-4.826)
  Top Layer w0.5: v1(10.16,-11.43) 11.456,-11.43 11.481,-11.455 IC1.13 ; v1(16.891,1.397) 16.911,1.417 IC4.7
  Top Layer w0.6: v5(43.979,-16.376) 52.407,-16.376 v1(52.451,-16.332) ; IC2.20 52.438,-16.319 v1(52.451,-16.332) ; 50.2 v1(53.086,-17.653) 53.086,-16.967 v1(52.451,-16.332)
  Top Layer w0.7: v2(17.018,9.652) 17.78,9.652 18.251,9.181 18.923,9.181
  Bottom Layer w0.2: v1(10.16,-11.43) 10.122,-11.468 9.741,-11.468 9.144,-12.065 9.144,-14.605 11.938,-17.399 v1(14.224,-17.399)
  Bottom Layer w0.3: v1(16.891,1.397) 16.256,2.032 ; 17.018,8.001 16.256,7.239 16.256,2.032 ; v1(18.288,-4.826) 18.288,-3.175 16.256,-1.143 16.256,2.032
  Bottom Layer w0.4: v1(10.16,-11.43) 13.716,-11.43 18.288,-6.858 v1(18.288,-4.826)
  Bottom Layer w0.6: v2(17.018,9.652) 17.018,8.001 17.018,6.985 19.431,4.572 29.083,4.572 32.131,1.524 32.131,-4.318 v5@44.069,-16.256
Net39_2: IC2.42
Net41_2: 5V.2 43.2 | length 6.5
  Top Layer w0.7: 43.2 52.034,24.626 52.034,18.173 5V.2
Net44_1: 44.1 44.2 IC3.3 | length 21.2
  Top Layer w0.7: 44.2 44.1 15.367,17.907 19.685,17.907 20.574,17.018 IC3.3
Net45_2: 3.3V.2 47.1 | length 3.7
  Top Layer w0.7: 3.3V.2 21.678,24.853 21.678,21.248 47.1
Net51_1: 51.1 IC4.2 | length 4.7
  Top Layer w0.5: IC4.2 20.49,1.442 20.746,1.442 22.909,3.605 23.523,3.605 23.783,3.865 51.1
Net52_1: 52.1 IC2.26 | length 18.4
  Top Layer w0.3: 52.1 52.1@58.187,-21.487
  Top Layer w0.6: IC2.26 60.147,-9.347 v1(60.96,-10.16) ; 52.1 v1(57.912,-18.796)
  Bottom Layer w0.6: v1(57.912,-18.796) 57.912,-13.208 v1(60.96,-10.16)
Net52_2: 52.2 IC_1.5 | length 15.8
  Top Layer w0.3: 52.2 57.761,-24.638 57.785,-24.662 57.785,-28.448 59.182,-29.845 63.246,-29.845 64.897,-28.194 64.897,-26.67 65.293,-26.274 IC_1.5
Net53_1: 53.1 IC2.25 | length 27.6
  Top Layer w0.3: 53.1@58.19,-31.913 53.1@58.19,-31.638
  Top Layer w0.6: IC2.25 59.296,-10.147 v1(61.087,-11.938) ; v1(57.531,-29.718) 57.531,-30.435 58.19,-31.094 53.1
  Bottom Layer w0.6: v1(57.531,-29.718) 57.531,-29.464 60.071,-26.924 60.071,-12.7 60.833,-11.938 v1(61.087,-11.938)
Net53_2: 53.2 IC_1.2 | length 6.8
  Top Layer w0.3: 53.2 62.611,-31.369 65.756,-28.224 IC_1.2
Net54_2: 54.2 65.1 IC2.38 | length 22.5
  Top Layer w0.6: IC2.38 50.838,0.8 56.388,6.35 56.388,13.687
  Top Layer w0.7: 65.1 54.578,11.572 54.578,14.082 54.2 55.978,14.097 56.388,13.687
Net55_1: 55.1 56.1 57.2 IC2.27 | length 35.8
  Top Layer w0.6: IC2.27 60.922,-8.547 61.087,-8.382 62.723,-6.746 62.723,13.701
  Top Layer w0.7: 56.1 60.801,11.572 60.801,14.209 57.2 62.201,14.224 62.723,13.701 63.627,12.798 65.154,12.798 55.1
Net60_1: 60.1 IC2.23 | length 12.8
  Top Layer w0.6: IC2.23 57.721,-11.747 60.325,-14.351 60.1
Net60_2: 60.2 IC_1.9 | length 3.5
  Top Layer w0.3: 60.2@60.05,-24.511 60.325,-24.511 60.325,-25.273 60.676,-25.624 IC_1.9
Net63_1: 63.1 FB.2 IC2.17 | length 74
  Top Layer w0.5: 43.942,-1.651 50.038,-7.747
  Top Layer w0.6: v1(41.275,-1.651) 43.942,-1.651 ; IC2.17 50.038,-7.747 ; v1(58.42,-7.239) v1(58.42,-1.27)
  Top Layer w0.7: 63.1 42.386,11.572 FB.2@42.386,13.882 ; FB.2@42.721,13.547 FB.2@42.386,13.882 ; v1(44.196,10.16) 44.196,13.687 43.786,14.097 FB.2 42.371,13.897 FB.2@42.386,13.882
  Bottom Layer w0.6: v1(41.275,-1.651) v1(41.275,4.318) ; v1(44.196,10.16) 44.196,7.239 v1(41.275,4.318) ; 55.753,-16.129 55.753,-13.716 58.42,-11.049 v1(58.42,-7.239) ; v1(58.42,-1.27) 55.816,1.333 49.593,1.333 46.609,4.318 v1(41.275,4.318)
Net66_1: 66.1 J2.7 | length 5.8
  Top Layer w0.5: 66.1@68.429,-31.623 68.429,-30.123 69.183,-29.369 J2.7
Net66_2: 66.2 IC_1.12 | length 8.8
  Top Layer w0.3: v1@61.229,-27.574 IC_1.12 ; v1(65.278,-30.226) 65.278,-31.242 66.2
  Top Layer w0.5: v1(61.214,-27.559) v1@61.229,-27.574
  Bottom Layer w0.3: v1(61.214,-27.559) 61.214,-29.337 61.976,-30.099 65.151,-30.099 v1(65.278,-30.226)
Net67_1: 67.1 70.2 | length 5.3
  Top Layer w0.7: 70.2 83.825,-11.806 85.725,-9.906 67.1@85.725,-9.52
Net67_2: 67.2 IC2.44 | length 49.8
  Top Layer w0.6: v1(45.974,-0.762) 46.038,-0.826 IC2.44
  Top Layer w0.7: v1(69.215,-15.748) 83.82,-15.748 85.979,-13.589 67.2
  Bottom Layer w0.7: v1@45.847,-0.762 v1(45.974,-0.762) 54.229,-0.762 v1(69.215,-15.748)
Net68_A2: 70.1 71.2 ?.A1@80.535,-7.1 | length 8.4
  Top Layer w1: ?.A1@80.535,-7.1 80.674,-6.962 82.397,-6.962 ; 70.1 82.88,-7.444 82.397,-6.962 ; 71.2 85.787,-6.962 82.397,-6.962
Net69_A2: 73.1 74.2 ?.A1@71.125,-7.087 | length 8.5
  Top Layer w1: ?.A1@71.125,-7.087 71.274,-6.938 74.215,-6.938 ; 73.1 73.406,-7.747 74.215,-6.938 ; 74.2 76.314,-6.938 74.215,-6.938
Net72_1: 72.1 73.2 | length 5.4
  Top Layer w0.7: 73.2 72.188,-11.759 73.944,-11.759 76.231,-9.472 72.1
Net72_2: 72.2 IC2.43 | length 39.7
  Top Layer w0.6: IC2.43 46.838,0.229 v1(46.863,0.254)
  Top Layer w0.7: v1(70.231,-14.478) 75.692,-14.478 76.581,-13.589 72.2
  Bottom Layer w0.7: v1(46.863,0.254) 55.118,0.254 69.85,-14.478 v1(70.231,-14.478)
Net_1: ?.1@8.367,-11.627 IC1.12 | length 6.9
  Top Layer w0.5: ?.1@8.367,-11.627 8.367,-10.326 8.66,-10.033 11.988,-10.033 12.281,-10.326 IC1.12@12.281,-11.811
NetD2_1: D2.1 IC_LM2.2 L2.2 | length 17.6
  Top Layer w1: L2.2 40.292,37.625 41.275,38.608 44.577,38.608 ; D2.1 43.307,37.338 44.577,38.608 ; IC_LM2.2 46.736,38.608 44.577,38.608
NetIC2_24: IC2.24 IC_1.11 | length 21.5
  Top Layer w0.3: v1(60.96,-26.289) 61.595,-26.924 IC_1.11
  Top Layer w0.6: IC2.24 58.522,-10.947 61.341,-13.766 v1(61.341,-14.732)
  Bottom Layer w0.6: v1(60.96,-26.289) 61.341,-25.908 v1(61.341,-14.732) v1@61.341,-14.605
NetIC2_41: IC2.41 | length 9.2
  Top Layer w0.6: v1(48.387,1.397) 48.438,1.346 IC2.41
  Bottom Layer w0.2: 42.601,1.397 v1(48.387,1.397)
NetJ2_2: IC_1.8 J2.2 | length 10.3
  Top Layer w0.3: IC_1.8 63.043,-24.974 64.141,-23.876 72.451,-23.876 J2.2
NetJ2_3: IC_1.3 J2.3 | length 6.9
  Top Layer w0.3: IC_1.3 67.676,-27.574 v1(67.691,-27.559) ; v1@71.374,-25.019 v1(71.399,-24.994) 71.424,-24.969 J2.3
  Bottom Layer w0.3: v1(67.691,-27.559) 68.834,-27.559 v1(71.399,-24.994)
NetJ2_5: IC_1.6 J2.5 | length 6.5
  Top Layer w0.3: IC_1.6 69.439,-25.624 70.993,-27.178 72.449,-27.178 J2.5
NetR1_1: IC1.7 R1.1 | length 2.9
  Top Layer w0.5: IC1.7 16.719,-12.745 R1.1@17.951,-11.513
NetR5_2: IC5.5 R5.2 | length 3.1
  Top Layer w0.3: R5.2 10.901,-3.62 11.276,-3.995 11.811,-3.995 13.035,-5.219 IC5.5
NetR6_2: IC5.6 R6.2 | length 2.5
  Top Layer w0.3: R6.2 11.151,-5.719 IC5.6
NetR7_2: IC5.7 R7.2 | length 3.5
  Top Layer w0.3: R7.2 10.901,-8.032 11.276,-7.657 11.377,-7.657 12.815,-6.219 IC5.7
NetY1_1: IC3.2 Y1_XTAL.2 | length 4.7
  Top Layer w0.7: IC3.2 21.844,17.399 22.352,17.907 Y1_XTAL.2
NetY1_2: IC3.1 Y1_XTAL.1 | length 2.5
  Top Layer w0.7: IC3.1 23.114,16.529 23.495,16.91 Y1_XTAL.1
VCC: 37.1 38.1 38.8 38.13 42.2 46.1 47.2 48.2 49.2 50.1 58.1 C4.1 IC1.1 IC1.3 IC1.6 IC4.1 IC4.4 IC5.8 IC_1.14 IC_AMS1.2 J2.4 R1.2 R4.1 | length 247.1
  Top Layer w0.2: 37.1 14.054,-24.054 14.264,-23.844 14.264,-23.582 14.769,-23.077 ; 14.351,-16.002 13.335,-17.018 13.335,-18.809 ; 38.1 14.1,-19.574 13.335,-18.809 ; 38.8 15.275,-22.571 14.769,-23.077 ; 38.13 v1(18.619,-21.574) 42.2@19.863,-21.574 ; v1(19.939,-14.986) 19.939,-15.113 19.939,-15.853 22.913,-18.827 R4.1 ; 13.335,-18.809 13.335,-22.606 13.806,-23.077 14.769,-23.077
  Top Layer w0.3: 12.446,-8.89 12.446,-8.863 12.065,-8.482 12.065,-7.689 13.035,-6.719 IC5.8 ; IC_1.14 63.455,-28.874 64.262,-28.067 64.262,-25.781 65.532,-24.511 v1(69.723,-24.511) 71.281,-26.069 J2.4 ; 58.1 v1(70.739,-21.971)
  Top Layer w0.5: v1@11.43,-19.431 v1(11.455,-19.406) 11.481,-19.38 11.481,-15.291 ; IC1.1 11.481,-15.291 ; 12.446,-8.89 18.288,-8.89 19.939,-7.239 ; IC1.3 13.081,-15.621 13.462,-16.002 ; IC1.6 15.481,-15.243 16.24,-16.002 ; R1.2 17.715,-14.527 16.24,-16.002 ; v1@19.939,-15.113 19.05,-16.002 16.24,-16.002 ; v1(19.939,-14.986) 19.939,-7.239 ; IC4.1 21.503,0.167 ; IC4.4 20.665,3.917 22.844,6.096 24.13,6.096 25.146,7.112 ; 49.2 23.546,1.457 23.486,1.397 22.733,1.397 21.503,0.167 ; 48.2@23.783,-1.264 23.535,-1.016 22.86,-1.016 21.503,-2.373 ; v6(25.146,8.763) 25.146,7.112 ; 46.1 50.419,-22.352 51.435,-23.368 54.102,-23.368 ; 50.1@53.711,-21.463 53.436,-21.188 50.1 53.086,-22.352 54.102,-23.368 ; 55.753,-16.129 55.753,-21.971 54.356,-23.368 54.102,-23.368 ; 11.481,-15.291 12.192,-16.002 13.462,-16.002 ; 13.462,-16.002 14.351,-16.002 16.24,-16.002 ; 19.939,-7.239 21.503,-5.675 ; 21.503,-5.675 21.503,-2.373 ; 21.503,-5.675 25.146,-2.032 25.146,7.112 ; 21.503,-2.373 21.503,0.167
  Top Layer w0.7: 47.2 24.765,21.161 24.765,20.066 25.527,19.304 25.908,19.304 ; v6(25.146,8.763) 25.146,18.542 25.908,19.304 ; IC_AMS1.2 29.591,20.732 28.163,19.304 ; C4.1 30.282,17.47 30.282,18.965 29.943,19.304 28.163,19.304 ; 25.908,19.304 28.163,19.304
  Bottom Layer w0.2: v1(18.619,-21.574) 18.619,-16.306 v1(19.939,-14.986)
  Bottom Layer w0.3: v1(69.723,-24.511) 70.739,-23.495 v1(70.739,-21.971)
  Bottom Layer w0.4: 13.716,-30.861 73.025,-30.861
  Bottom Layer w0.5: v1(11.455,-19.406) 11.455,-28.6 13.716,-30.861 ; v1(70.739,-21.971) 73.914,-21.971 75.184,-23.241 75.184,-28.702 73.025,-30.861
pads on no net: 38.2 38.3 38.4 38.5 38.6 38.7 38.12 38.14 38.15 38.16 38.17 38.19 38.21 ?.1@45.085,-35.941 ?.2@47.625,-35.941 ?.3 ?.4 ?.5 ?.12 ?.14 IC1.8 IC1.9 IC1.10 IC2.1 IC2.2 IC2.3 IC2.9 IC2.10 IC2.11 IC2.12 IC2.13 IC2.14 IC2.15 IC2.16 IC2.21 IC2.22 IC2.29 IC2.30 IC2.31 IC2.32 IC2.33 IC2.34 IC2.35 IC2.36 IC2.37 IC2.40 IC3.7 IC4.5 IC4.6 IC5.3 IC_AMS1.4 J2.1 J2.8 J2.9 J2.14 J2.15
copper on no net: | length 341.7
  Top Layer w0.2: v1(18.542,-22.349) 16.875,-22.349 ; v1(29.718,1.397) v1(42.601,1.397) ; 16.875,-22.349 16.875,-22.074 16.875,-22.349
  Top Layer w0.6: v1(40.005,-17.145) 38.227,-18.923 38.227,-27.813 42.037,-31.623 50.8,-31.623 52.705,-33.528 52.705,-35.941 ; v1(40.259,-4.699) 40.907,-5.347 41.034,-5.347 44.288,-5.347 ; v1@41.783,-4.572 v1(41.808,-4.547) 44.288,-4.547 ; v1(42.99,-3.747) 44.288,-3.747 ; 44.288,-10.947 41.631,-10.947 33.909,-18.669 33.909,-28.067 40.005,-34.163 46.736,-34.163 47.371,-34.798 47.625,-35.052 47.625,-35.941 ; 44.288,-10.147 40.526,-10.147 32.258,-18.415 32.258,-28.702 39.37,-35.814 44.958,-35.814 45.085,-35.941 ; 46.038,-13.497 41.494,-13.497 36.449,-18.542 36.449,-28.067 41.275,-32.893 49.53,-32.893 50.165,-33.528 50.165,-35.941 ; v1@46.838,-14.64 46.838,-13.497
  Top Layer w1.3: v4(88.397,15.946) 90.353,15.946 90.424,15.875 ; v4(88.519,8.636) 90.805,8.636
  Bottom Layer w0.2: v1@18.542,-22.352 19.304,-22.352 19.685,-21.971 19.685,-16.383 20.828,-15.24 20.828,-7.493 25.654,-2.667 v1(29.718,1.397)
  Bottom Layer w0.4: v1(40.259,-4.699) 41.021,-5.461 42.672,-5.461 49.53,-12.319 49.53,-14.097 47.371,-16.256 47.371,-26.162 48.768,-27.559 ; v1(41.808,-4.547) 42.774,-4.547 50.165,-11.938 50.165,-14.605 48.006,-16.764 48.006,-24.257 51.308,-27.559 ; v1(42.99,-3.747) 50.8,-11.557 50.8,-14.732 48.768,-16.764 48.768,-22.733 50.673,-24.638 53.594,-27.559 53.848,-27.559
  Bottom Layer w0.6: v1(40.005,-17.145) 44.321,-17.145 v1(46.826,-14.64)
  Bottom Layer w1.3: 71.189,17.805 77.47,11.524 77.47,7.366 77.47,6.858 79.248,5.08 82.931,5.08 86.487,8.636 v4(88.519,8.636) ; 80.607,17.957 82.689,15.875 85.217,15.875 v4@88.397,15.875
  other v1: 55.753,-16.129
  other v3: 22.86,-35.941 77.86,-35.941 22.86,34.059 77.86,34.059

## Polygon pours and split planes (outlines as drawn)
GND on Top Layer "GROUND PLANE" (solid, pour order 0): 0.038,0 ccw(c50.038,0) 50.038,-50 ccw(c50.038,0) 100.038,0 ccw(c50.038,0) 50.038,50 ccw(c50.038,0)

## Other copper
Top Layer:
  rectangle net GND: 88.808,-0.663 93.808,4.337
  rectangle net GND: 88.773,-7.794 93.773,-2.794
  rectangle: 88.646,6.43 93.646,11.43
  rectangle: 88.681,13.561 93.681,18.561
  rectangle net GND: 39.624,41.482 44.624,46.482
  rectangle net 12V: 56.341,41.355 61.341,46.355

## Silkscreen, mask and mechanical layers (free items; w line width, h text height)
Top Overlay:
  drawing of 624 lines, arcs and shapes, not listed
  text "GND" at 40.64,46.863 h1
  text "+12V" at 56.769,46.736 h1
  text "R" at 93.98,17.653 h0.7
  text "+12V" at 96.139,9.525 h1.5 r90
  text "L" at 94.107,6.604 h0.7
  text "P" at 38.231,3.723 h3.5
  text "H" at 42.923,3.735 h3.5
  text "L" at 53.456,3.723 h3.5
  text "I" at 57.737,3.72 h3.5
  text "O" at 60.471,3.702 h3.5
  text "N" at 65.424,3.702 h3.5
  text "A" at 32.959,3.689 h3.5
  text "E" at 48.498,3.689 h3.5
  text "GND" at 96.139,-4.064 h1.5 r90
  text "SCL" at 17.426,-4.472 h0.3 r90
  text "SDA" at 18.823,-4.472 h0.3 r90
  text "ICSP" at 39.77,-25.635 h1.5
  text "GND" at 42.999,-29.645 h0.5
  text "RST" at 45.539,-29.645 h0.5
  text "SCK" at 48.079,-29.645 h0.5
  text "MISO" at 50.492,-29.645 h0.5
  text "MOSI" at 53.286,-29.645 h0.5
  text "RX" at 44.523,-38.154 h0.5
  text "TX" at 47.063,-38.154 h0.5
  text "PD3" at 49.476,-38.154 h0.5
  text "PD4" at 51.889,-38.154 h0.5
  text "Designed by A.E.C" at 43.126,-45.507 h0.8
  text "Powered by O.Z.D" at 43.38,-46.904 h0.8
  text "#17102018" at 46.174,-48.441 h0.8
Top Solder:
  rectangle: 88.808,-0.489 93.608,4.311
  rectangle: 88.773,-7.62 93.573,-2.82
  rectangle: 88.646,6.604 93.446,11.404
  rectangle: 88.681,13.735 93.481,18.535
  rectangle: 39.624,41.656 44.424,46.456
  rectangle: 56.414,41.428 61.214,46.228
Mechanical 1:
  circle w0.2: c50.038,0 r50